# Altium PCB T-Display SF32 V0.6(1).PcbDoc (part 2 of 2)
Units mil, origin at the board's own origin, x right, y up, seen from the top; angles counter-clockwise.
Board outline 1672.83 x 1680.71 mil, 4 copper layers (Top, GND, POWER, Bottom), stack 35.4 mil thick; 133 components, 115 nets, 507 pads, 349 vias.
Unrouted connection lines stored in the file: 310.
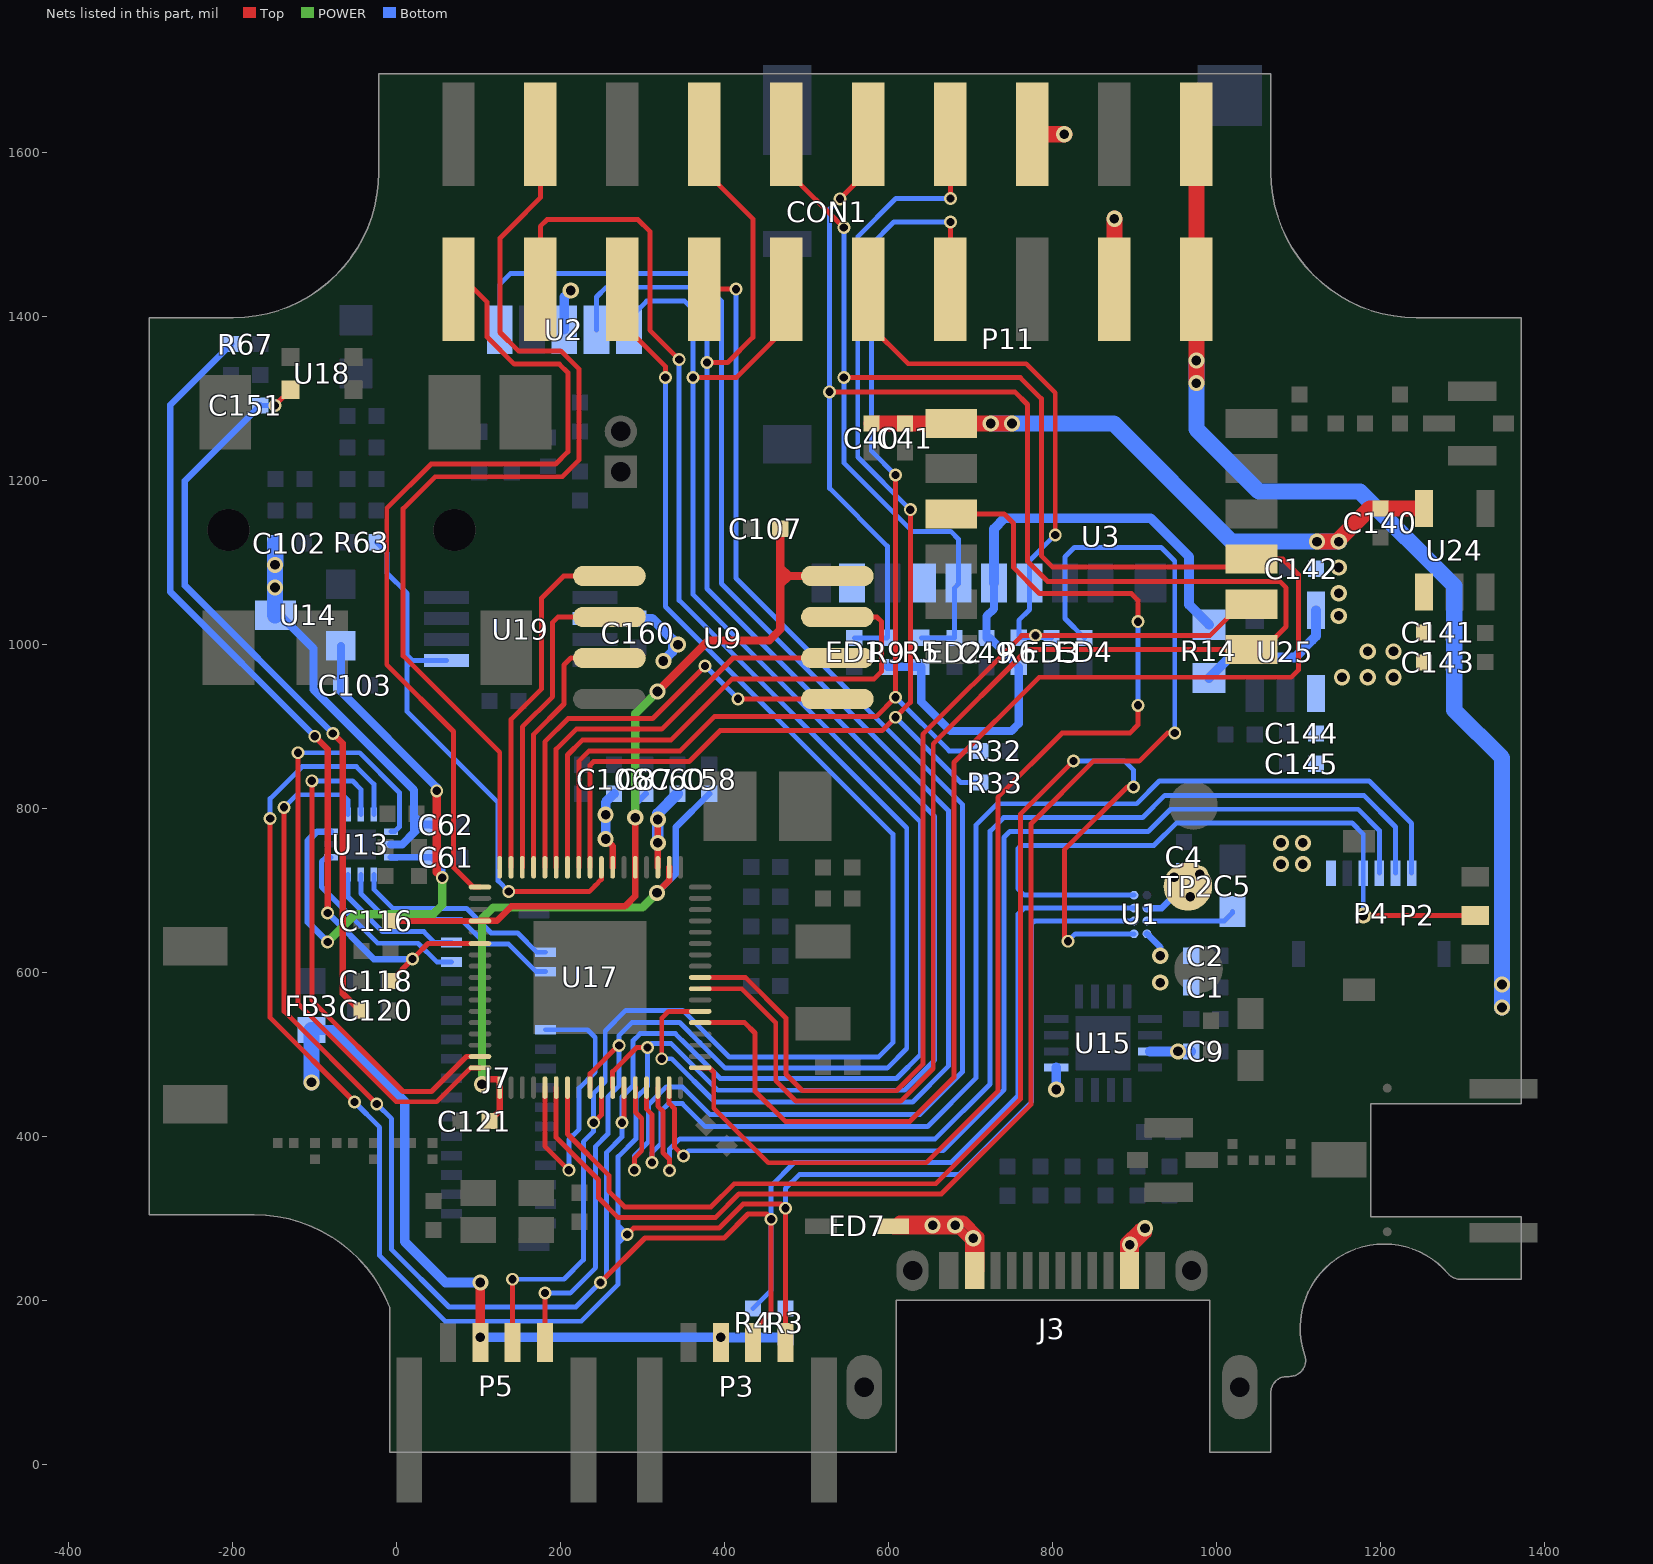
[diagram p3: the nets of this part, all layers, seen from the top]

## Via types
v1: diameter 19.68, hole 11.81, Top to Bottom, 234 vias
v2: diameter 15.75, hole 10, Top to Bottom, 115 vias

## Nets (pads, with @x,y where several pads share a name; then routed paths per layer and width w, separated by ;. In a path a pad name is that pad's centre, name@x,y a point inside that pad or via, vN(x,y) a via of type N, cw(c..) or ccw(c..) an arc to the next point about the centre after c; other vN are vias at no path point) (continued)
LORA_MISO: CON1.9 ED1.1 P11.7 R9.2 U3.7 U17.8 | length 2802.9
  Top w6: U17.8@370.92,580.71 421.65,580.71 462.99,539.37 462.99,468.5 487.8,443.7 615.35,443.7 655.12,483.46 655.12,879.53 770.08,994.49 U3.7@1043.31,994.49 1057.48,994.49 1085.43,1022.44 1085.43,1069.68 1077.56,1077.56 794.49,1077.56 770.08,1101.97 770.08,1293.31 754.72,1308.66 v2(528.74,1308.66) ; v2(541.34,1544.09) 575.98,1578.74 CON1.9@575.98,1622.84
  Bottom w6: v2(541.34,1544.09) 528.74,1531.5 v2(528.74,1308.66) 528.74,1190.94 599.22,1120.47 599.22,1075.59 599.21,1051.57 599.14,1051.51 R9.2@599.14,1008.72 599.02,1008.6 ED1.1@558.73,1008.6
LORA_MOSI: CON1.10 ED3.1 P11.3 R6.2 U3.8 U17.9 | length 1921.2
  Top w6: U17.9@370.92,594.49 425.98,594.49 475.59,544.88 475.59,476.38 495.67,456.3 610.24,456.3 642.52,488.58 642.52,890.94 762.99,1011.42 v2(779.92,1011.42) 992.52,1011.42 1030.71,1049.61 U3.8@1043.31,1049.61 ; CON1.10@575.98,1433.86 575.98,1391.34 624.41,1342.91 768.5,1342.91 803.94,1307.48 v2(803.94,1134.25)
  Bottom w6: ED3.1@799.28,1008.6 799.16,1008.72 v2@782.62,1008.72 ; v2(803.94,1134.25) 772.45,1102.76 772.45,1075.59 772.45,1042.91 759.45,1029.92 759.45,1008.79 R6.2@759.38,1008.72 v2@777.23,1008.72 ; v2@777.23,1008.72 779.92,1008.72 v2@782.62,1008.72 ; v2@777.23,1008.72 v2(779.92,1011.42) v2@782.62,1008.72
LORA_RST: U3.3 U17.1 | length 1493.6
  Top w6: U17.1@370.92,484.25 382.28,484.25 387.4,479.13 387.4,435.04 453.94,368.5 646.46,368.5 733.86,455.91 733.86,814.17 812.2,892.52 894.88,892.52 904.72,902.36 v2(904.72,926.38) ; U3.3@677.17,1159.84 741.34,1159.84 753.15,1148.03 753.15,1094.09 784.65,1062.6 896.85,1062.6 904.72,1054.72 v2(904.72,1028.35)
  Bottom w6: v2(904.72,926.38) v2(904.72,1028.35)
LORA_SCK: CON1.11 ED2.1 P11.5 R5.2 U3.9 U17.5 | length 2935.7
  Top w6: U17.5@370.92,539.37 425.2,539.37 437.79,526.77 437.79,455.91 474.8,418.9 626.77,418.9 680.32,472.44 680.32,856.69 784.25,960.63 1091.73,960.63 1100.39,969.29 1100.39,1060.24 1100.39,1085.83 1081.5,1104.72 U3.9@1043.31,1104.72 1033.86,1095.28 800.39,1095.28 787.01,1108.66 787.01,1300.39 761.42,1325.98 v2(546.06,1325.98) ; CON1.11@475.98,1622.84 475.98,1579.13 v2(546.06,1509.06)
  Bottom w6: v2(546.06,1509.06) v2(546.06,1325.98) 546.06,1222.05 577.17,1190.94 588.58,1179.53 629.53,1138.58 676.38,1138.58 685.83,1129.14 685.83,1075.59 685.83,1074.34 681.17,1069.68 ED2.1@681.17,1008.6 640.61,1008.6 R5.2@640.48,1008.72
LORA_VDD: C40.2 C41.2 C140.2 U3.1 U24.5 | length 802.6
  Top w19.68: C40.2@579.92,1270.08 C41.2@620.87,1270.08 U3.1@677.17,1270.08 v1(751.18,1270.08) ; v1(1123.23,1125.98) 1147.24,1125.98 1187.8,1166.54 C140.2@1200.39,1166.54 1200.63,1166.3 U24.5@1253.6,1166.3
  Bottom w19.68: v1(725.2,1270.08) v1(751.18,1270.08) 875.2,1270.08 1019.29,1125.98 v1(1123.23,1125.98) v1(1149.61,1125.98)
MIC_ADC: C120.2 C151.2 U18.4 | length 911.5
  Top w6: v2(-147.64,1292.13) U18.4@-128.54,1311.23
  Top w7.87: v2(-77.17,892.13) -64.96,879.92 -64.96,574.8 -44.49,554.33 C120.2@-42.13,554.33
  Bottom w6: C151.2@-165.75,1292.13 v2(-147.64,1292.13)
  Bottom w7.87: C151.2@-165.75,1292.13 -257.48,1200.39 -257.48,1072.44 v2(-77.17,892.13)
MIC_BIAS: C118.1 R67.1 U17.40 | length 1058.8
  Top w6: C118.1@-6.69,590.16 20.08,616.99 v2(20.08,616.93) 23.99,620.84 23.99,620.9 38.91,635.83 U17.40@102.3,635.83
  Top w7.87: v2(-99.21,888.58) -83.46,872.83 v2(-83.46,673.23)
  Bottom w7.87: R67.1@-201.12,1367 -275.2,1292.92 -275.2,1064.57 v2(-99.21,888.58) ; v2(-83.46,673.23) -27.17,616.93 v2(20.08,616.93)
NTC: P2.2 P4.4 U1.D1 | length 869.7
  Top w6: v1(1179.53,670.08) P2.2@1316.14,670.08
  Bottom w6: U1.D1@900,694.88 780.71,694.88 766.14,694.88 758.27,702.76 758.27,751.57 762.2,755.51 924.41,755.51 951.97,783.07 1165.75,783.07 1179.53,769.29 P4.4@1179.53,721.66 v1(1179.53,670.08)
PA10: CON1.20 U17.35 | length 1060.4
  Top w6: CON1.20@75.98,1433.86 95.28,1433.86 111.02,1418.11 111.02,1375.59 144.09,1342.52 199.21,1342.52 209.45,1332.28 209.45,1235.43 194.49,1220.47 42.52,1220.47 -11.42,1166.54 -11.42,975.98 70.08,894.49 70.08,728.74 94.09,704.73 U17.35@102.3,704.73
PA11: CON1.17 U17.34 | length 1212.8
  Top w6: U17.34@126.37,728.8 126.37,868.9 8.66,986.61 8.66,1166.14 47.64,1205.12 202.76,1205.12 222.83,1225.2 222.83,1336.61 200.79,1358.66 149.21,1358.66 126.77,1381.1 126.77,1488.19 126.77,1496.15 141.49,1510.87 175.98,1545.36 CON1.17@175.98,1622.84
PA20: R63.2 U17.25 U19.1 | length 687.2
  Top w6: v2(137.4,699.21) 235.43,699.21 242.72,706.5 250.39,714.17 U17.25@250.39,728.8
  Bottom w6: R63.2@-23.95,1125.26 -11.02,1112.33 -11.02,1087.4 13.39,1062.99 13.39,987.6 ; U19.1@61.61,980.91 20.08,980.91 ; v2(137.4,699.21) 124.41,712.2 124.41,807.48 13.39,918.5 13.39,974.21 ; 13.39,974.21 13.39,987.6 ; 13.39,974.21 20.08,980.91 ; 13.39,987.6 20.08,980.91
PA33: P4.3 U17.67 | length 1357.6
  Top w6: U17.67@333.07,460.18 333.07,440.94 339.37,434.65 339.37,387.8 v2(350.39,376.77)
  Bottom w6: v2(350.39,376.77) 356.69,383.07 666.93,383.07 741.34,457.48 741.34,765.35 748.43,772.44 917.32,772.44 944.49,799.61 1074.8,799.61 1173.23,799.61 1199.22,773.62 P4.3@1199.22,721.66
PA34: P4.2 U17.66 | length 1450
  Top w6: U17.66@319.29,460.18 319.29,437.4 325.59,431.11 325.59,380.71 333.46,372.83 v2(333.46,359.06)
  Bottom w6: v2(333.46,359.06) 333.46,385.04 346.06,397.64 657.48,397.64 724.41,464.57 724.41,772.83 740.94,789.37 910.24,789.37 937.4,816.54 1180.32,816.54 1218.9,777.95 P4.2@1218.9,721.66
PA35: P4.1 U17.65 | length 1529.5
  Top w6: U17.65@305.51,460.18 305.51,433.86 312.2,427.17 v2(312.2,368.9)
  Bottom w6: v2(312.2,368.9) 312.2,381.1 322.83,391.73 322.83,431.1 332.28,440.55 349.21,440.55 377.17,412.6 648.03,412.6 707.48,472.05 707.48,780.71 733.07,806.3 903.15,806.3 931.1,834.25 1186.61,834.25 1238.59,782.28 P4.1@1238.59,721.66
PA36: CON1.14 U17.64 | length 1729.3
  Top w6: v2(290.55,359.45) 290.55,374.02 299.61,383.07 299.61,422.44 291.73,430.32 U17.64@291.73,460.18 ; CON1.14@375.98,1433.86 v2(414.57,1433.86)
  Bottom w6: v2(290.55,359.45) 290.55,376.77 307.87,394.09 307.87,439.37 329.53,461.02 349.21,461.02 382.68,427.56 638.98,427.56 690.55,479.13 690.55,805.51 414.57,1081.5 v2(414.57,1433.86)
PA39: CON1.16 P5.3 U17.61 | length 1957.9
  Top w6: P5.3@142.12,149.21 v2(142.13,226.38) ; v2(240.94,417.32) 250.39,426.77 U17.61@250.39,460.18 ; CON1.16@275.98,1433.86 275.98,1392.13 328.35,1339.76 v2(328.35,1325.98)
  Bottom w6: v2(142.13,226.38) 204.72,226.38 228.35,250 228.35,394.09 240.94,406.69 v2(240.94,417.32) 240.94,453.15 255.12,467.32 255.12,529.13 280.32,554.33 349.61,554.33 406.69,497.24 588.19,497.24 605.91,514.96 605.91,769.29 328.35,1046.85 v2(328.35,1325.98)
PA40: CON1.18 P5.4 U17.60 | length 2233.3
  Top w6: CON1.18@175.98,1433.86 175.98,1510.63 184.25,1518.9 294.88,1518.9 309.45,1504.33 309.45,1383.86 v2(345.28,1348.03) ; P5.4@181.49,149.21 v2(181.5,209.45) ; U17.60@236.61,460.18 236.61,477.17 270.87,511.42 v2(272.05,511.42)
  Bottom w6: v2(181.5,209.45) 212.2,209.45 243.31,240.55 243.31,388.58 258.27,403.54 258.27,448.82 272.05,462.6 v2(272.05,511.42) 272.05,524.02 287.8,539.76 345.67,539.76 370.47,514.96 401.57,483.86 598.82,483.86 622.83,507.87 622.83,776.77 345.28,1054.33 v2(345.28,1348.03)
PWR_INT: U1.A1 U17.58 | length 1562.8
  Top w6: U17.58@209.05,460.18 209.05,403.54 259.45,353.15 259.45,333.86 278.74,314.57 383.86,314.57 412.2,342.91 658.27,342.91 761.42,446.06 761.42,793.7 v2(825.98,858.27) ; v2(819.29,638.58) 814.96,642.91 814.96,750 891.73,826.77 v2(899.21,826.77)
  Bottom w6: v2(819.29,638.58) 828.35,647.64 U1.A1@900,647.64 ; v2(825.98,858.27) 881.5,858.27 888.58,858.27 899.21,847.64 v2(899.21,826.77)
SCL: CON1.13 P3.4 R3.1 U1.B1 U2.2 U13.9 U17.62 | length 4743
  Top w6: v2(-153.54,788.19) -153.54,545.28 v2(-50.79,442.52) ; U17.62@264.17,460.18 264.17,479.53 293.7,509.06 v2(306.69,509.06) ; v2(281.89,281.1) 289.76,288.98 394.09,288.98 423.23,318.11 469.68,318.11 v2(474.8,312.99) P3.4@474.8,149.21 ; CON1.13@375.98,1622.84 375.98,1578.74 435.04,1519.68 435.04,1375.2 404.33,1344.49 v2(379.13,1344.49)
  Bottom w6: v2(-153.54,788.19) -153.54,812.6 -114.57,851.57 -48.43,851.57 -27.17,830.32 U13.9@-27.17,793.28 ; v2(-50.79,442.52) -20.08,411.81 -20.08,255.12 59.84,175.2 225.98,175.2 270.87,220.08 270.87,270.08 ; U2.2@244.49,1384.25 244.49,1424.41 256.3,1436.22 357.87,1436.22 379.13,1414.96 v2(379.13,1344.49) 379.13,1068.5 656.69,790.94 656.69,493.5 620.08,456.89 392.32,456.89 335.43,513.78 311.42,513.78 v2(306.69,509.06) 306.69,461.81 292.52,447.64 292.52,397.64 270.87,375.98 270.87,292.13 ; R3.1@474.87,190.88 474.87,297.57 474.8,297.64 v2(474.8,312.99) 474.8,337.01 491.73,353.94 686.22,353.94 775.2,442.91 775.2,659.85 778.74,663.39 U1.B1@900,663.39 ; 270.87,270.08 275.98,275.2 276.38,275.59 v2(281.89,281.1) ; 270.87,270.08 270.87,275.59 ; 270.87,275.59 275.98,280.71 v2@276.38,281.1 ; 270.87,275.59 270.87,281.1 ; 270.87,281.1 v2@275.98,281.1 ; 270.87,281.1 270.87,286.22 ; 270.87,286.22 v2@275.98,281.1 ; 270.87,286.22 270.87,292.13 ; 270.87,292.13 275.98,287.01 276.38,286.61 v2(281.89,281.1) ; v2@275.98,281.1 v2@276.38,281.1 ; v2@276.38,281.1 v2(281.89,281.1)
SCL_1V8: J7.5 U13.2 | length 287.6
  Bottom w6: U13.2@-42.91,720.1 -42.91,696.85 -11.02,664.96 79.53,664.96 109.06,635.43 137.01,635.43 170.86,601.58 J7.5@182,601.58
SD_CS: ED4.1 P11.2 U17.57 | length 1778.1
  Top w6: U17.57@195.27,460.18 195.27,399.21 246.85,347.64 246.85,325.59 270.87,301.57 389.37,301.57 418.11,330.32 664.96,330.32 774.41,439.76 774.41,782.28 850.39,858.27 906.3,858.27 940.55,892.52 v2(949.61,892.52)
  Bottom w6: ED4.1@839.44,1008.6 815.75,1032.29 815.75,1075.59 815.75,1107.48 827.16,1118.9 933.07,1118.9 949.61,1102.36 v2(949.61,892.52)
SD_VDD: C49.2 P11.4 R5.1 R6.1 R9.1 R14.2 | length 837.4
  Bottom w10: R9.1@599.15,973.29 R5.1@640.48,973.29 640.55,973.22 640.55,930.38 675.98,894.95 750.39,894.95 759.38,903.94 R6.1@759.38,973.29 724.4,1008.27 C49.2@720.08,1008.27 720.08,1035.04 729.14,1044.09 729.14,1075.59
  Bottom w11.81: 729.14,1075.59 729.14,1141.54 742.13,1154.53 920.08,1154.53 966.93,1107.68 966.93,1049.04 R14.2@991.34,1024.63
SDA: CON1.12 P3.3 R4.1 U1.C1 U2.1 U13.7 U17.63 | length 4329.9
  Top w6: v2(-136.61,801.97) -136.61,553.15 v2(-23.62,440.16) ; v2(249.21,222.44) 303.54,276.77 400,276.77 429.13,305.91 451.97,305.91 457.48,300.39 v2(457.48,299.61) 457.48,186.22 435.43,164.17 P3.3@435.43,149.21 ; v2(275.59,417.32) 277.95,419.68 U17.63@277.95,460.18 ; v2(362.2,1325.98) 414.96,1325.98 476.38,1387.4 476.38,1433.46 CON1.12@475.98,1433.86
  Bottom w6: v2(-136.61,801.97) -121.26,817.32 -65.35,817.32 -58.66,810.63 U13.7@-58.66,793.28 ; v2(-23.62,440.16) -5.51,422.05 -5.51,262.6 64.57,192.52 219.29,192.52 v2(249.21,222.44) 256.69,229.92 256.69,381.1 275.59,400 v2(275.59,417.32) 275.59,448.82 288.98,462.2 288.98,517.32 297.64,525.98 340.55,525.98 354.13,512.4 395.28,471.26 610.24,471.26 639.76,500.79 639.76,783.86 362.2,1061.42 v2(362.2,1325.98) 362.2,1409.06 351.97,1419.29 305.51,1419.29 283.86,1397.64 U2.1@283.86,1384.25 ; R4.1@435.5,190.88 457.48,212.86 v2(457.48,299.61) 457.48,340.55 485.83,368.9 677.17,368.9 758.27,450 758.27,671.65 765.75,679.13 U1.C1@900,679.13
SDA_1V8: J7.4 U13.4 | length 241
  Bottom w6: U13.4@-79.5,740.94 -85.83,740.94 -90.94,735.83 -90.94,704.72 -22.44,636.22 26.77,636.22 49.61,613.39 J7.4@67.6,613.39
SEN_IRQ: U2.5 U17.6 | length 1882.8
  Top w6: v2(324.02,495.28) 324.02,544.88 332.28,553.15 U17.6@370.92,553.15
  Bottom w6: U2.5@126.38,1384.25 126.38,1439.76 139.76,1453.15 362.99,1453.15 396.85,1419.29 396.85,1074.8 673.62,798.03 673.62,486.22 629.92,442.52 388.98,442.52 336.22,495.28 v2(324.02,495.28)
SPI_CS: U9.1 U17.33 | length 437.7
  Top w6: U17.33@140.15,728.8 140.16,909.06 140.55,909.45 177.56,946.46 177.56,1057.28 204.33,1084.06 U9.1@260.23,1084.06
SPI_HOLD: U9.7 U17.28 | length 679.2
  Top w6: U17.28@209.05,728.8 209.05,865.75 227.17,883.86 335.04,883.86 409.84,958.66 583.07,958.66 592.13,967.72 592.13,1028.35 586.42,1034.06 U9.7@538.19,1034.06
SPI_MISO: U9.5 U17.30 | length 565.1
  Top w6: U17.30@181.49,728.8 181.49,881.89 209.84,910.24 312.99,910.24 376.77,974.02 376.77,974.21 v2(376.77,974.41) ; v2(416.93,934.25) 417.13,934.06 U9.5@538.19,934.06
  Bottom w6: v2(376.77,974.41) v2(416.93,934.25)
SPI_MOSI: U9.2 U17.32 | length 386.2
  Top w6: U17.32@153.93,728.8 153.94,900 190.94,937.01 190.94,1027.56 197.64,1034.25 260.04,1034.25 U9.2@260.23,1034.06
SPI_SCK: U9.6 U17.29 | length 533
  Top w6: U17.29@195.27,728.8 195.27,872.83 219.68,897.24 324.02,897.24 410.83,984.06 U9.6@538.19,984.06
SPI_WP: U9.3 U17.31 | length 321.3
  Top w6: U17.31@167.71,728.8 167.72,890.94 204.72,927.95 204.72,975.79 212.99,984.06 U9.3@260.23,984.06
T_INT: J7.2 U13.3 | length 176.8
  Bottom w6: U13.3@-58.66,720.1 -58.66,692.52 -16.54,650.39 33.86,650.39 47.24,637.01 J7.2@67.6,637.01
T_RST: J7.3 U13.1 | length 259.1
  Bottom w6: U13.1@-27.17,720.1 -27.17,701.97 -3.94,678.74 85.83,678.74 115.75,648.82 148.03,648.82 171.65,625.2 J7.3@182,625.2
TP_INT: U13.8 U17.50 | length 631.4
  Top w6: v2(-102.76,834.25) -102.76,566.54 8.46,455.32 43.11,455.32 85.83,498.03 U17.50@102.3,498.03
  Bottom w6: v2(-102.76,834.25) -53.15,834.25 -42.91,824.02 U13.8@-42.91,793.28
TP_RST: U13.10 U17.51 | length 793.2
  Top w6: v2(-119.68,868.5) -119.68,562.2 -119.29,562.2 0,442.91 49.61,442.91 90.94,484.25 U17.51@102.3,484.25
  Bottom w6: v2(-119.68,868.5) -44.49,868.5 3.94,820.08 3.94,777.95 -1.57,772.44 U13.10@-6.32,772.44
UART_RXD: CON1.8 R32.2 U17.27 | length 1432.2
  Top w6: U17.27@222.83,728.8 222.83,858.27 235.04,870.47 346.06,870.47 388.19,912.6 585.43,912.6 v2(609.06,936.22) v2(609.06,1207.09) ; CON1.8@675.98,1433.86 v2(675.98,1515.75)
  Bottom w6: v2(609.06,936.22) 674.41,870.87 712.47,870.87 R32.2@712.54,870.8 ; v2(609.06,1207.09) 579.92,1236.22 579.92,1488.58 607.09,1515.75 v2(675.98,1515.75)
UART_TXD: CON1.7 R33.2 U17.26 | length 1489.1
  Top w6: U17.26@236.61,728.8 236.61,853.54 240.94,857.87 357.48,857.87 395.28,895.67 592.91,895.67 v2(609.06,911.81) 627.17,929.92 v2(627.17,1164.96) ; v2(675.98,1544.49) CON1.7@675.98,1622.84
  Bottom w6: v2(609.06,911.81) 688.58,832.28 712.86,832.28 R33.2@712.93,832.22 ; v2(627.17,1164.96) 562.99,1229.13 562.99,1231.89 562.99,1498.03 609.45,1544.49 675.59,1544.49 v2(675.98,1544.49)
VBAT: C4.1 C60.2 TP2.1 U1.C2 U17.20 | length 202.3
  Top w7.87: U17.20@319.29,728.8 v1(319.29,758.66) v1(319.29,787.01)
  Bottom w7.87: U1.C2@915.74,679.13 929.53,679.13 929.92,679.13 930.35,679.13 931.52,679.13 933.86,679.13 961.02,706.3 C4.1@961.02,724.02
  Bottom w13.78: v1(319.29,758.66) 319.29,794.49 C60.2@343.31,818.5
  other v1: 968.5,692.91 948.82,716.54 980.32,720.47
VBUS: C1.2 C2.2 C9.1 CON1.1 CON1.2 ED7.1 J3.A4 J3.A9 J3.B4 J3.B9 U1.A2 U15.3 U15.9 | length 1853.6
  Top w11.81: J3.A4@699.61,237.01 699.61,274.41 687.4,286.61 606.2,286.61 ED7.1@606.2,290.94 613.78,298.52 613.78,298.43 691.73,298.43 711.42,278.74 711.42,276.38 J3.B9@711.42,237.01 ; J3.B4@888.58,237.01 888.58,268.5 888.58,271.26 905.91,288.58 v1(913.39,288.58) 915.75,286.22 915.75,282.68 901.57,268.5 900.39,267.32 J3.A9@900.39,237.01
  Top w19.68: v1(975.98,1319.29) v1(975.98,1346.85) CON1.2@975.98,1433.86 CON1.1@975.98,1622.84
  Bottom w7.87: U1.A2@915.74,647.64 922.05,641.34 931.89,631.49 v1(931.89,620.87)
  Bottom w11.81: v1(805.12,457.87) U15.9@805.11,484.65 ; U15.3@919.28,504.27 v1(953.54,504.33) v1@953.61,504.27 ; v1(953.54,504.33) v1@953.61,504.27 ; C9.1@969.69,504.33 969.62,504.27 v1@953.61,504.27
  Bottom w19.68: v1(975.98,1346.85) 975.98,1263.39 1052.36,1187.01 1175.59,1187.01 1290.55,1072.05 1290.55,920.47 1348.82,862.2 v1(1348.82,585.83) v1(1348.82,557.87)
  other v1: 894.88,268.5 703.94,276.38 654.33,292.13 681.89,292.13 931.89,588.19
VCI_EN: J7.11 U17.56 | length 352.8
  Top w6: U17.56@181.49,460.18 181.49,420.08 181.5,388.58 v2(210.63,359.45)
  Bottom w6: J7.11@182,530.71 233.46,530.71 242.91,521.26 242.91,479.13 223.23,459.45 223.23,409.45 210.63,396.85 v2(210.63,359.45)
VDD1V8: C61.2 C103.1 U13.6 U13.12 U14.2 | length 778.3
  Top w10: v2(49.61,822.05) 49.61,722.83 v2(56.3,716.14)
  POWER w10: v2(-83.46,637.8) -49.61,671.65 45.28,671.65 56.3,682.68 v2(56.3,716.14)
  Bottom w7.87: v2(-83.46,637.8) -107.48,661.81 -107.48,761.42 -96.46,772.44 U13.6@-79.5,772.44 ; U13.12@-6.32,740.94 C61.2@43.31,740.94 56.3,727.89 v2(56.3,716.14)
  Bottom w10: C103.1@-67.32,950.79 C103.1@-67.3,957.48 ; U14.2@-67.3,998.72 C103.1@-67.3,957.48 ; v2(49.61,822.05) 49.61,826.38 -67.3,943.28 -67.13,943.45 -67.13,957.31 C103.1@-67.3,957.48
VDD3V3: C62.2 C102.1 C142.2 CON1.4 CON1.5 FB3.1 P3.2 P5.2 R3.2 R4.2 R14.1 U2.3 U13.11 U14.3 U25.5 | length 1806.5
  Top w11.81: P5.2@102.75,149.21 v1(102.76,155.51) v1(102.76,222.44)
  Top w19.68: CON1.5@775.98,1622.84 v1(814.96,1622.83) ; CON1.4@875.98,1433.86 v1(875.98,1519.68)
  Bottom w10: U14.3@-147.64,1036.17 U14.3@-147.3,1036.22 ; U14.3@-147.64,1042.52 -147.3,1042.18 -100.79,995.67 -100.79,945.47 21.85,822.83 21.85,790.62 ; U13.11@-6.32,756.69 7.48,756.69 21.85,771.06 ; C62.2@43.7,780.71 31.63,780.84 ; 21.85,771.06 31.63,780.84 ; 21.85,771.06 21.85,790.62 ; 21.85,790.62 31.63,780.84
  Bottom w11.81: FB3.1@-103.15,530.24 -103.07,530.32 -77.17,530.32 10.63,442.52 10.63,272.05 60.24,222.44 v1(102.76,222.44) ; v1(102.76,155.51) v1@395.28,155.51 ; U2.3@205.12,1384.25 205.12,1424.41 v1(212.99,1432.28) ; v1(396.06,155.51) v1@395.28,155.51 ; R3.2@474.87,155.45 R4.2@435.5,155.45 v1(396.06,155.51) 395.34,155.45 v1@395.28,155.51 ; R14.1@991.34,959.63 1016.36,984.65 1096.01,984.65 1117.27,1005.91 1121.99,1010.63 U25.5@1121.99,1042.28
  Bottom w19.68: U14.3@-147.64,1036.17 -147.64,1042.52 v1(-147.64,1070.08) v1(-147.64,1097.64) -147.44,1097.83 C102.1@-147.64,1124.02 ; v1(-103.15,466.54) FB3.1@-103.15,530.24
  other v1: 1149.61,1035.43 1149.61,1062.99 1149.61,1094.49
VOUT1: C87.2 C107.1 C116.1 U9.8 U17.22 U17.38 | length 999.2
  Top w7.09: C116.1@-6.69,663.39 -6.75,663.39 U17.38@102.3,663.39
  Top w7.87: U17.38@102.3,663.39 122.84,663.39 140.55,681.1 279.13,681.1 291.73,693.7 U17.22@291.73,728.8 v1(291.73,789.37)
  Top w10: v1(318.9,943.31) 381.1,1005.51 455.12,1005.51 468.5,1018.9 468.5,1073.43 ; C107.1@468.5,1141.73 468.5,1094.68 ; U9.8@538.19,1084.06 479.13,1084.06 ; 468.5,1073.43 468.5,1084.06 468.5,1094.68 ; 468.5,1073.43 479.13,1084.06 ; 468.5,1094.68 479.13,1084.06
  POWER w10: v1(291.73,789.37) 291.73,916.14 v1(318.9,943.31)
  Bottom w7.87: v1(291.73,789.37) 291.73,805.84 C87.2@304.33,818.5
VSYS: C5.1 C106.2 C141.2 C143.2 C144.2 C145.2 C160.1 P4.6 U1.B2 U17.24 U19.6 U24.1 U25.1 | length 352.7
  Top w7.87: v1(255.51,763.39) 264.17,754.72 U17.24@264.17,728.8
  Bottom w6: U1.B2@915.74,663.39 929.92,663.39 930.35,663.39 931.52,663.39 939.79,663.39 950,663.39 968.5,663.39 969.69,663.39 971.23,663.39 971.63,663.39 1010.24,663.39 1020.14,673.29 C5.1@1020.14,674.73
  Bottom w11.81: U19.6@242.72,1032.09 C160.1@295.28,1032.09 312.01,1032.09 v1@337.4,1006.69 ; v1(255.51,763.39) v1(255.51,792.91) 255.51,808.27 C106.2@265.75,818.5 ; v1(325.98,980.32) 337.4,991.73 v1@337.4,1006.69 ; v1(343.7,1000.39) v1@337.4,1006.69
  other v1: 1079.13,732.68 1105.91,732.68 1079.13,758.66 1105.91,758.66 1153.54,960.63 1185.04,960.63 1216.54,960.63 1185.04,992.13 1216.54,992.13
VSYS_3V3: C58.2 C121.1 U17.19 U17.52 | length 691.6
  Top w7.87: v1(104.72,464.17) 111.02,470.47 122.83,470.47 126.38,466.93 U17.52@126.37,460.18 ; C121.1@113.78,419.29 126.38,431.95 U17.52@126.37,460.18 ; v1(318.11,697.64) 333.07,712.6 U17.19@333.07,728.8
  POWER w10: v1(104.72,464.17) 104.72,666.14 118.5,679.92 300.39,679.92 v1(318.11,697.64)
  Bottom w7.87: v1(318.11,697.64) 341.34,720.87 341.34,777.95 C58.2@381.89,818.5
pads on no net: J3.A8 J3.B8 J7.13 J7.23 J7.24 J7.26 J7.27 J7.29 J7.30 J15.2 P11.1 P11.8 P11.14 P11.CD U3.6 U15.10 U15.11 U15.12 U15.13 U15.14 U15.15 U15.16 U17.21 U23.1 U23.8 U24.4 U25.4

## Polygon pours and split planes (outlines as drawn)
GND on Top (solid, remove dead copper, pour order 6): -355.91,1735.83 1418.9,1735.83 1418.9,-3.15 -355.91,-3.15
AGND on Top (solid, remove dead copper, pour order 0): -322.83,1385.04 -322.79,1386.41 -322.64,1387.78 -322.4,1389.13 -322.07,1390.47 -321.65,1391.77 -321.13,1393.05 -320.53,1394.28 -319.84,1395.47 -319.08,1396.61 -318.23,1397.69 -317.31,1398.71 -316.32,1399.67 -315.27,1400.55 -314.16,1401.36 -312.99,1402.09 -311.78,1402.73 -310.52,1403.29 -309.23,1403.76 -307.91,1404.14 -306.57,1404.43 -305.21,1404.62 -303.84,1404.71 -303.15,1404.72 -118.78,1404.72 -117.41,1404.68 -116.04,1404.53 -114.69,1404.29 -113.36,1403.96 -112.05,1403.54 -110.78,1403.02 -109.54,1402.42 -108.35,1401.73 -107.21,1400.96 -106.13,1400.12 -105.11,1399.2 -104.86,1398.96 -61.67,1355.77 -60.67,1354.83 -59.6,1353.96 -58.47,1353.18 -57.3,1352.47 -56.07,1351.84 -54.81,1351.31 -53.51,1350.86 -52.18,1350.5 -50.83,1350.24 -49.47,1350.07 -48.1,1350 -47.75,1350 225.98,1350 227.36,1349.95 228.72,1349.81 230.08,1349.57 231.41,1349.24 232.72,1348.81 233.99,1348.3 235.23,1347.7 236.42,1347.01 237.55,1346.24 238.64,1345.39 239.66,1344.48 240.61,1343.49 241.5,1342.43 242.3,1341.32 243.03,1340.16 243.68,1338.94 244.24,1337.69 244.71,1336.4 245.08,1335.08 245.37,1333.73 245.56,1332.37 245.66,1331 245.67,1330.32 245.67,967.72 245.62,966.34 245.48,964.98 245.24,963.62 244.91,962.29 244.48,960.98 243.97,959.71 243.37,958.48 242.68,957.28 241.91,956.15 241.06,955.06 240.14,954.04 239.16,953.09 238.1,952.2 236.99,951.4 235.83,950.67 234.61,950.02 233.36,949.46 232.07,949 230.75,948.62 229.4,948.33 228.04,948.14 226.67,948.04 225.98,948.03 -303.15,948.03 -304.52,948.08 -305.89,948.22 -307.24,948.46 -308.58,948.79 -309.88,949.22 -311.16,949.73 -312.39,950.34 -313.58,951.02 -314.72,951.79 -315.8,952.64 -316.82,953.56 -317.78,954.54 -318.66,955.6 -319.47,956.71 -320.2,957.87 -320.84,959.09 -321.4,960.34 -321.87,961.63 -322.25,962.95 -322.54,964.3 -322.73,965.66 -322.82,967.03 -322.83,967.72
GND on Bottom (solid, remove dead copper, pour order 2): -353.94,1731.89 1418.11,1731.89 1418.11,-1.18 -353.94,-1.18
AGND on Bottom (solid, remove dead copper, pour order 1): -322.83,1385.04 -322.79,1386.41 -322.64,1387.78 -322.4,1389.13 -322.07,1390.47 -321.65,1391.77 -321.13,1393.05 -320.53,1394.28 -319.84,1395.47 -319.08,1396.61 -318.23,1397.69 -317.31,1398.71 -316.32,1399.67 -315.27,1400.55 -314.16,1401.36 -312.99,1402.09 -311.78,1402.73 -310.52,1403.29 -309.23,1403.76 -307.91,1404.14 -306.57,1404.43 -305.21,1404.62 -303.84,1404.71 -303.15,1404.72 -118.78,1404.72 -117.41,1404.68 -116.04,1404.53 -114.69,1404.29 -113.36,1403.96 -112.05,1403.54 -110.78,1403.02 -109.54,1402.42 -108.35,1401.73 -107.21,1400.96 -106.13,1400.12 -105.11,1399.2 -104.86,1398.96 -61.67,1355.77 -60.67,1354.83 -59.6,1353.96 -58.47,1353.18 -57.3,1352.47 -56.07,1351.84 -54.81,1351.31 -53.51,1350.86 -52.18,1350.5 -50.83,1350.24 -49.47,1350.07 -48.1,1350 -47.75,1350 225.98,1350 227.36,1349.95 228.72,1349.81 230.08,1349.57 231.41,1349.24 232.72,1348.81 233.99,1348.3 235.23,1347.7 236.42,1347.01 237.55,1346.24 238.64,1345.39 239.66,1344.48 240.61,1343.49 241.5,1342.43 242.3,1341.32 243.03,1340.16 243.68,1338.94 244.24,1337.69 244.71,1336.4 245.08,1335.08 245.37,1333.73 245.56,1332.37 245.66,1331 245.67,1330.32 245.67,967.72 245.62,966.34 245.48,964.98 245.24,963.62 244.91,962.29 244.48,960.98 243.97,959.71 243.37,958.48 242.68,957.28 241.91,956.15 241.06,955.06 240.14,954.04 239.16,953.09 238.1,952.2 236.99,951.4 235.83,950.67 234.61,950.02 233.36,949.46 232.07,949 230.75,948.62 229.4,948.33 228.04,948.14 226.67,948.04 225.98,948.03 -303.15,948.03 -304.52,948.08 -305.89,948.22 -307.24,948.46 -308.58,948.79 -309.88,949.22 -311.16,949.73 -312.39,950.34 -313.58,951.02 -314.72,951.79 -315.8,952.64 -316.82,953.56 -317.78,954.54 -318.66,955.6 -319.47,956.71 -320.2,957.87 -320.84,959.09 -321.4,960.34 -321.87,961.63 -322.25,962.95 -322.54,964.3 -322.73,965.66 -322.82,967.03 -322.83,967.72
VBUS on POWER (solid, remove dead copper, pour order 10): 661.02,-18.5 659.65,-18.46 658.28,-18.31 656.93,-18.07 655.6,-17.74 654.29,-17.32 653.02,-16.8 651.78,-16.2 650.59,-15.51 649.45,-14.74 648.37,-13.9 647.35,-12.98 646.39,-11.99 645.51,-10.94 644.7,-9.83 643.98,-8.66 643.33,-7.45 642.77,-6.19 642.3,-4.9 641.92,-3.58 641.64,-2.24 641.45,-0.88 641.35,0.49 641.34,1.18 641.34,640.16 641.39,641.53 641.53,642.9 641.77,644.25 642.1,645.58 642.53,646.89 643.04,648.16 643.64,649.4 644.33,650.59 645.1,651.73 645.94,652.81 646.86,653.83 647.85,654.79 648.9,655.67 650.02,656.48 651.18,657.21 652.39,657.85 653.65,658.41 654.94,658.88 656.26,659.26 657.61,659.54 658.97,659.73 660.34,659.83 661.02,659.84 1369.29,659.84 1370.66,659.79 1372.03,659.65 1373.38,659.41 1374.72,659.08 1376.02,658.66 1377.3,658.14 1378.53,657.54 1379.72,656.85 1380.86,656.08 1381.94,655.24 1382.97,654.32 1383.92,653.33 1384.8,652.28 1385.61,651.17 1386.34,650 1386.98,648.79 1387.54,647.53 1388.01,646.24 1388.39,644.92 1388.68,643.58 1388.87,642.22 1388.96,640.84 1388.98,640.16 1388.98,1.18 1388.93,-0.19 1388.78,-1.56 1388.55,-2.91 1388.21,-4.24 1387.79,-5.55 1387.27,-6.83 1386.67,-8.06 1385.99,-9.25 1385.22,-10.39 1384.37,-11.47 1383.45,-12.49 1382.46,-13.45 1381.41,-14.33 1380.3,-15.14 1379.13,-15.87 1377.92,-16.51 1376.67,-17.07 1375.37,-17.54 1374.05,-17.92 1372.71,-18.2 1371.35,-18.4 1369.98,-18.49 1369.29,-18.5
VDD3V3 on POWER (solid, remove dead copper, pour order 7): 157 vertices, not listed, extent -316.93,444.88 1389.37,1731.1
GND on POWER (solid, remove dead copper, pour order 5): 157 vertices, not listed, extent -316.93,-18.5 625.98,659.84
VSYS on POWER (solid, remove dead copper, pour order 4): 209 vertices, not listed, extent 150.79,670.08 1389.76,1008.27
VBAT on POWER (solid, remove dead copper, pour order 3): 297.24,670.08 295.87,670.13 294.5,670.27 293.15,670.51 291.82,670.84 290.51,671.27 289.24,671.78 288,672.38 286.81,673.07 285.67,673.84 284.59,674.68 283.57,675.6 282.62,676.59 281.73,677.64 280.92,678.76 280.2,679.92 279.55,681.13 278.99,682.39 278.52,683.68 278.14,685 277.86,686.35 277.67,687.71 277.57,689.08 277.56,689.76 277.56,787.4 277.61,788.77 277.75,790.14 277.99,791.49 278.32,792.83 278.75,794.13 279.26,795.41 279.86,796.64 280.55,797.83 281.32,798.97 282.16,800.05 283.08,801.08 284.07,802.03 285.12,802.91 286.24,803.72 287.4,804.45 288.61,805.09 289.87,805.65 291.16,806.12 292.48,806.5 293.83,806.79 295.19,806.98 296.56,807.07 297.24,807.09 978.35,807.09 979.72,807.04 981.09,806.9 982.44,806.66 983.77,806.32 985.08,805.9 986.35,805.38 987.59,804.78 988.78,804.1 989.92,803.33 991,802.48 992.02,801.56 992.98,800.57 993.86,799.52 994.67,798.41 995.39,797.24 996.04,796.03 996.6,794.78 997.07,793.48 997.45,792.16 997.73,790.82 997.92,789.46 998.02,788.09 998.03,787.4 998.03,689.76 997.98,688.39 997.84,687.02 997.6,685.67 997.27,684.34 996.84,683.03 996.33,681.76 995.73,680.52 995.04,679.33 994.27,678.19 993.43,677.11 992.51,676.09 991.52,675.14 990.47,674.25 989.35,673.44 988.19,672.72 986.98,672.07 985.72,671.51 984.43,671.04 983.11,670.66 981.76,670.38 980.4,670.19 979.03,670.09 978.35,670.08
GND on GND (solid, remove dead copper, pour order 9): -353.54,1732.68 1418.9,1732.68 1418.9,-0.39 -353.54,-0.39
AGND on GND (solid, remove dead copper, pour order 8): -322.83,1385.04 -322.79,1386.41 -322.64,1387.78 -322.4,1389.13 -322.07,1390.47 -321.65,1391.77 -321.13,1393.05 -320.53,1394.28 -319.84,1395.47 -319.08,1396.61 -318.23,1397.69 -317.31,1398.71 -316.32,1399.67 -315.27,1400.55 -314.16,1401.36 -312.99,1402.09 -311.78,1402.73 -310.52,1403.29 -309.23,1403.76 -307.91,1404.14 -306.57,1404.43 -305.21,1404.62 -303.84,1404.71 -303.15,1404.72 -118.78,1404.72 -117.41,1404.68 -116.04,1404.53 -114.69,1404.29 -113.36,1403.96 -112.05,1403.54 -110.78,1403.02 -109.54,1402.42 -108.35,1401.73 -107.21,1400.96 -106.13,1400.12 -105.11,1399.2 -104.86,1398.96 -61.67,1355.77 -60.67,1354.83 -59.6,1353.96 -58.47,1353.18 -57.3,1352.47 -56.07,1351.84 -54.81,1351.31 -53.51,1350.86 -52.18,1350.5 -50.83,1350.24 -49.47,1350.07 -48.1,1350 -47.75,1350 225.98,1350 227.36,1349.95 228.72,1349.81 230.08,1349.57 231.41,1349.24 232.72,1348.81 233.99,1348.3 235.23,1347.7 236.42,1347.01 237.55,1346.24 238.64,1345.39 239.66,1344.48 240.61,1343.49 241.5,1342.43 242.3,1341.32 243.03,1340.16 243.68,1338.94 244.24,1337.69 244.71,1336.4 245.08,1335.08 245.37,1333.73 245.56,1332.37 245.66,1331 245.67,1330.32 245.67,967.72 245.62,966.34 245.48,964.98 245.24,963.62 244.91,962.29 244.48,960.98 243.97,959.71 243.37,958.48 242.68,957.28 241.91,956.15 241.06,955.06 240.14,954.04 239.16,953.09 238.1,952.2 236.99,951.4 235.83,950.67 234.61,950.02 233.36,949.46 232.07,949 230.75,948.62 229.4,948.33 228.04,948.14 226.67,948.04 225.98,948.03 -303.15,948.03 -304.52,948.08 -305.89,948.22 -307.24,948.46 -308.58,948.79 -309.88,949.22 -311.16,949.73 -312.39,950.34 -313.58,951.02 -314.72,951.79 -315.8,952.64 -316.82,953.56 -317.78,954.54 -318.66,955.6 -319.47,956.71 -320.2,957.87 -320.84,959.09 -321.4,960.34 -321.87,961.63 -322.25,962.95 -322.54,964.3 -322.73,965.66 -322.82,967.03 -322.83,967.72

## Keep-outs
Top:
  region: 475.2,671.26 565.75,671.26 565.75,505.51 475.2,505.51 475.2,671.26
  region: 839.37,205.91 839.37,328.35 859.06,328.35 859.06,205.91 839.37,205.91
  region: 959.84,383.86 1108.66,383.86 1108.66,398.03 1185.43,398.03 1185.43,345.67 1108.66,345.67 1108.66,359.45 959.84,359.45 959.84,383.86
  region: 133.86,476.38 134.09,413.39 133.17,408.78 130.56,404.87 126.66,402.26 122.05,401.34 122.05,401.57 -200.79,401.57 -200.79,421.26 -287.4,421.26 -287.4,365.35 -200.79,365.35 -200.79,383.46 122.83,383 132.05,384.84 139.87,390.06 145.09,397.87 146.92,407.09 146.46,407.09 146.46,476.38 133.86,476.38
  region: 67.72,364.57 202.36,364.57 202.36,253.94 67.72,253.94 67.72,364.57
  region: 1004.33,1291.34 1295.28,1291.34 1295.28,1249.21 1004.33,1249.21 1004.33,1291.34
Keep-Out Layer:
  lines w6: -237.8,852.13 -166.93,852.13 ; -7.48,191.52 -7.48,15.71 610.24,15.71 610.24,200.75 992.13,200.75 992.13,15.71 1066.93,15.71 1066.93,88.08 cw(c1086.61,88.08) 1086.61,107.76 1089.55,107.76 ccw(c1089.55,127.45) 1108.17,133.82 ; -7.44,191.41 ccw(c-172.83,127.91) -172.83,305.08 -300.79,305.08 -300.79,1399.17 -198.43,1399.17 ccw(c-198.43,1576.34) -21.26,1576.34 -21.26,1696.42 1066.93,1696.42 1066.93,1576.34 ccw(c1244.09,1576.34) 1244.09,1399.17 1372.05,1399.17 1372.05,440.71 1188.98,440.71 1188.98,302.91 1372.05,302.91 1372.05,226.34 ; 1108.23,133.67 cw(c1205.01,167) 1282.96,233.34 ; 1238.19,852.13 1309.06,852.13 ; 1283.03,233.27 ccw(c1298.02,246.02) 1298.02,226.34 1372.05,226.34 ; 1372.05,226.34 1372.05,226.34

## Other copper
Top:
  region net $$$16377: 366.93,707.09 383.07,723.23 427.17,723.23 466.93,762.99 466.93,842.91 469.68,845.67 531.5,845.67 534.25,842.91 534.25,719.68 530.71,716.14 501.77,716.14 487.2,701.57 370.47,701.57 369.29,702.76 369.29,707.09 366.93,707.09
  region net BAT: 962.6,634.65 1064.17,634.65 1076.77,622.05 1076.77,538.19 1068.9,530.32 982.68,530.32 974.8,538.19 974.8,564.57 948.43,590.94 948.43,620.47 962.6,634.65
  region net VSYS: 1145.28,950 1250,950 1265.75,965.75 1265.75,1087.01 1262.99,1089.76 1238.19,1089.76 1229.13,1080.71 1229.13,1052.36 1142.13,965.35 1142.13,953.15 1145.28,950
  region net $$$16633: 344.49,730.71 344.49,825.98 364.17,845.67 439.76,845.67 442.52,842.91 442.52,755.91 421.65,735.04 361.42,735.04 353.94,727.56 347.64,727.56 344.49,730.71
  region net BAT: 1335.83,704.72 1335.83,759.45 1330.71,764.57 1274.8,764.57 1269.68,759.45 1269.68,708.27 1275.2,702.76 1333.86,702.76 1335.83,704.72
Bottom:
  region net VSYS: 1116.54,847.64 1108.27,855.91 1108.27,964.17 1148.43,1004.33 1221.26,1004.33 1229.13,996.46 1229.13,930.71 1146.06,847.64 1116.54,847.64
  region net VBUS: 976.38,569.29 928.35,569.29 918.5,579.13 918.5,641.34 920.47,643.31 972.05,643.31 980.71,634.65 980.71,573.62 976.38,569.29
  region net VSYS: 928.35,664.17 930.71,666.54 980.32,666.54 1007.87,694.09 1045.28,694.09 1068.9,717.72 1068.9,764.57 1074.02,769.68 1132.68,769.68 1142.13,760.24 1142.13,666.54 1125.98,650.39 938.98,650.39 928.35,661.02 928.35,664.17
  region net BAT: 1033.07,633.46 1060.24,633.46 1079.92,613.78 1079.92,588.19 1087.01,581.1 1186.61,581.1 1204.72,599.21 1204.72,672.44 1226.77,694.49 1254.72,694.49 1265.75,705.51 1265.75,762.2 1270.47,766.93 1316.93,766.93 1322.05,761.81 1322.05,670.87 1306.3,655.12 1264.17,655.12 1255.51,646.46 1255.51,577.56 1213.39,535.43 1039.76,535.43 1027.56,547.64 1027.56,627.95 1033.07,633.46
  region net VBAT: 927.56,675.2 972.44,675.2 986.61,689.37 986.61,731.5 982.68,735.43 951.97,735.43 938.98,722.44 938.98,693.7 927.56,682.28 927.56,675.2
  region net VDD3V3: 1110.24,1007.87 1110.24,1100.79 1114.17,1104.72 1157.48,1104.72 1165.35,1096.85 1165.35,1035.43 1133.86,1003.94 1114.17,1003.94 1110.24,1007.87

## Silkscreen, mask and mechanical layers (free items; w line width, h text height)
Silkscreen Top:
  text "LoRa" at 1129.13,1338.19 h78.74
  text "SPK" at 412.99,1186.61 h78.74 r90
  text "BT" at -225.59,673.62 h78.74 r90
  text "25-11-26" at 779.53,468.11 h98.43 r90
  text "T-Display-SF32 V0.6" at 700.79,273.62 h98.43 r90
  text "LoRa" at 975.59,271.65 h78.74
  text "3V3" at 411.81,183.86 h59.06 r90
  text "SDA" at 450.79,182.68 h59.06 r90
  text "SCL" at 489.37,183.46 h59.06 r90
  text "GND" at 372.05,181.1 h59.06 r90
  text "3V3" at 116.93,179.53 h51.18 r90
  text "PA39" at 156.69,178.74 h47.24 r90
  text "PA40" at 195.28,178.74 h47.24 r90
  text "GND" at 76.38,175.98 h51.18 r90
Silkscreen Bottom:
  text "INT" at 111.02,1431.5 h59.06 r270
  text "SCL" at 227.17,1426.38 h59.06 r270
  text "SDA" at 266.93,1425.98 h59.06 r270
  text "3V3" at 188.58,1423.62 h59.06 r270
  text "GND" at 147.64,1419.68 h59.06 r270
  text "SD Card" at 1055.12,1174.02 h78.74 r270
Layer_105:
  circle w1: c1273.62,852.17 r66.93
  circle w1: c-202.36,852.17 r66.93